# EAGLE board EDC-1 (EAGLE 9.6.2)
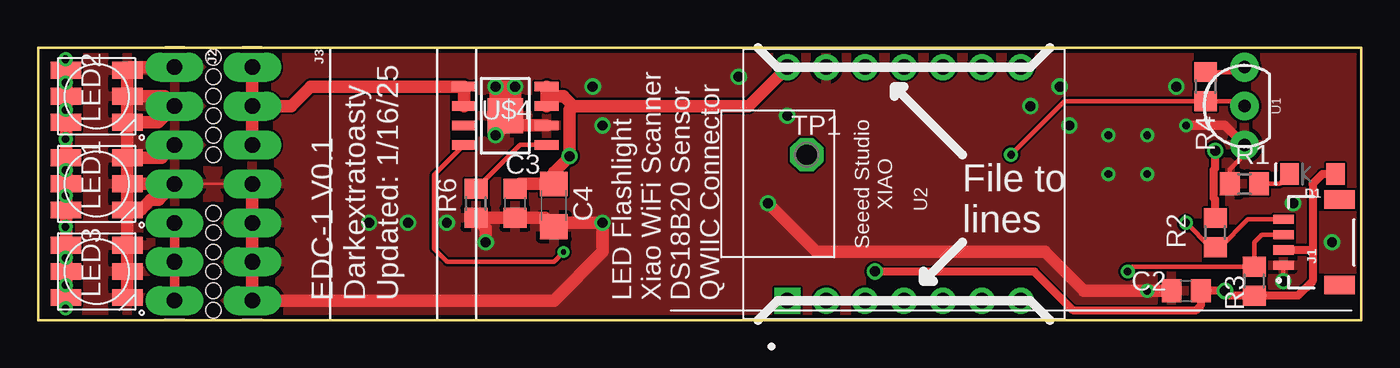
[diagram p0: board, top side]
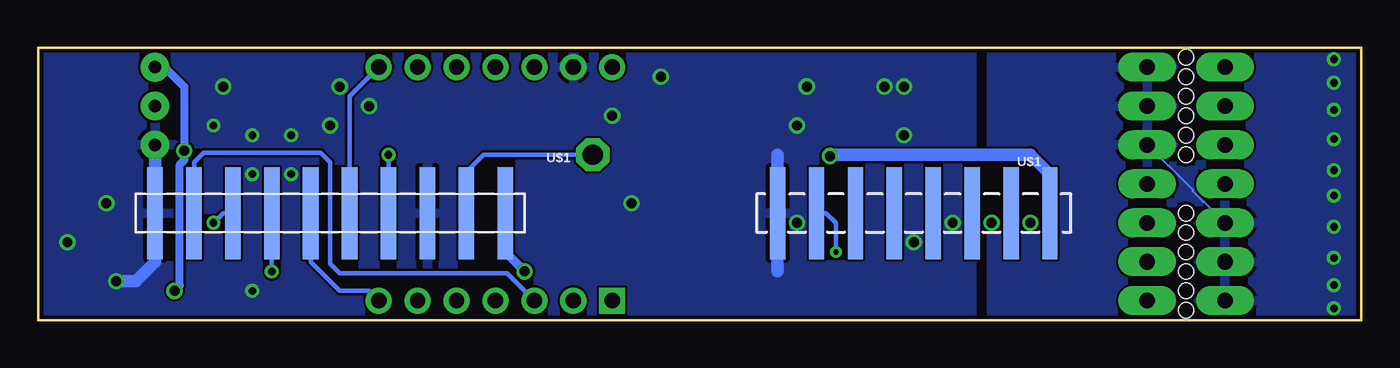
[diagram p1: board, bottom side, seen from below]

Size 86.36 x 17.78 mm. Coordinates in mm from the lower left corner, seen from the top.
Outline: 86.36,0 0,0 0,17.78 86.36,17.78 86.36,0
Copper layers (1*16): Top 0.035mm / dielectric 1.5mm / Bottom 0.035mm
Design rules "default *": minimum track width 6mil, minimum drill 0.35mm, track to track 6mil, track to pad 6mil, pad to pad 6mil, via to via 6mil, smd to smd 6mil, copper to edge 10mil, drill to drill 6mil, minimum pad ring 10mil, minimum via ring 8mil, stop-mask expansion 4mil, vias tented up to drill 0mil, thermal gap 10mil
Holes 1 mm at 11.43,14.61 11.43,13.34 11.43,17.14 11.43,15.88 11.43,1.91 11.43,0.64 11.43,3.17 11.43,4.45 11.43,5.71 11.43,6.99 11.43,12.06 11.43,10.79

## Footprints (pad centres in the part's own frame; a part is rotated, then mirrored left to right if it is on the bottom)
C0805 = smd 1.3 x 1.5: 1 -0.95,0; 2 0.95,0
C3216 = smd 1.6 x 1.8: 1 -1.4,0; 2 1.4,0
LED-1206 = smd 1.2 x 1.4: A -1.5,0; C 1.5,0
JST04_1MM_RA = smd 0.6 x 1.35: 1 -1.5,0; 2 -0.5,0; 3 0.5,0; 4 1.5,0 | smd 1.2 x 2: NC1 2.8,-3.675; NC2 -2.8,-3.675
1X07_LONGPADS = drill 1.016 pad 1.88 long: 1 0,0; 2 2.54,0; 3 5.08,0; 4 7.62,0; 5 10.16,0; 6 12.7,0; 7 15.24,0
RGBLED5050 = smd 2 x 1.1: 1 -2,1.7; 2 -2,0; 3 -2,-1.7; 4 2,-1.7; 5 2,0; 6 2,1.7
R0805 = smd 1.3 x 1.5: 1 -0.95,0; 2 0.95,0
P1-13 = drill 1.321 pad 2.159 octagon: TP 0,0
TO-92-AMMO = drill 0.813 pad 1.88: 1 -2.54,0; 2 0,0; 3 2.54,0
XIAO-GENERIC-THRUHOLE-MODULE14P-2.54-21X17.8MM = drill 1 pad 1.7 square: 1 -7.62,7.62 | drill 1 pad 1.7: 2 -7.62,5.08; 3 -7.62,2.54; 4 -7.62,0; 5 -7.62,-2.54; 6 -7.62,-5.08; 7 -7.62,-7.62; 8 7.62,-7.62; 9 7.62,-5.08; 10 7.62,-2.54; 11 7.62,0; 12 7.62,2.54; 13 7.62,5.08; 14 7.62,7.62
BOTH-SMD = smd 1.02 x 6 bottom: 1 7.62,0; 2 10.16,0; 3 12.7,0; 4 15.24,0; 5 17.78,0; 6 20.32,0; 7 22.86,0; 8 25.4,0; 9 27.94,0; 10 30.48,0 | smd 1 x 6 bottom: 19 -27.94,-0.001; 20 -22.86,-0.001; 21 -20.32,0.001; 22 -17.78,-0.001; 23 -15.24,0.001; 24 -12.7,-0.001; 25 -10.16,0.001; 26 -25.4,-0.001
SOIC127P600X175-9N = smd 1.55 x 0.6: 1 -2.7,1.905; 2 -2.7,0.635; 3 -2.7,-0.635; 4 -2.7,-1.905; 5 2.7,-1.905; 6 2.7,-0.635; 7 2.7,0.635; 8 2.7,1.905 | smd 2.3 x 2.3: 9 0,0

## Placement (x,y rotation side)
C2  1uf  [C0805]  74.93,1.91 180 top
C3  1uf  [C0805]  31.11,7.62 270 top
C4  22uf  [C3216]  33.66,7.49 270 top
D1  Yellow  [LED-1206]  83.19,9.53 180 top
J1  QWIIC_RIGHT_ANGLE  [JST04_1MM_RA]  81.28,5.08 90 top
J2  [1X07_LONGPADS]  8.89,16.51 270 top
J3  [1X07_LONGPADS]  13.97,16.51 270 top
LED1  RGBLED5050  [RGBLED5050]  3.81,8.89 0 top
LED2  RGBLED5050  [RGBLED5050]  3.81,14.61 0 top
LED3  RGBLED5050  [RGBLED5050]  3.81,3.17 0 top
R1  2K2  [R0805]  78.74,8.89 0 top
R2  10K  [R0805]  76.83,5.71 270 top
R3  10K  [R0805]  79.38,2.54 90 top
R4  10K  [R0805]  76.2,15.24 270 top
R6  10K  [R0805]  28.57,7.62 90 top
TP1  PTR1PAD1-13  [P1-13]  50.16,10.79 0 top
U1  DS18B20  [TO-92-AMMO]  78.74,13.97 90 top
U2  XIAO-THRUHOLE  [XIAO-GENERIC-THRUHOLE-MODULE14P-2.54-21X17.8MM]  56.52,8.89 90 top
U$1  BOTH-SMD  [BOTH-SMD]  48.26,6.99 0 top
U$4  CN5711  [SOIC127P600X175-9N]  30.48,13.34 180 top

## Library data of the parts
C2-C4 = rcl; SPICEPREFIX: C
D1 = SparkFun-LED; PROD_ID: DIO-09909
J1 = SparkFun-Connectors; PROD_ID: CONN-13694
J2 J3 = SparkFun-Connectors
LED1-LED3 = adafruit
R1-R4 R6 = rcl; SPICEPREFIX: R
TP1 = testpad
U1 = DS18B20; AVAILABILITY: In Stock; CHECK_PRICES: https://www.snapeda.com/parts/DS18B20/UMW/view-part/?ref=eda; DESCRIPTION: Temperature Sensor Digital, Local -55°C ~ 125°C 9 b, 10 b, 11 b, 12 b TO-92; MF: UMW; MP: DS18B20; PACKAGE: None; PRICE: None; SNAPEDA_LINK: https://www.snapeda.com/parts/DS18B20/UMW/view-part/?ref=snap
U2 = Seeed Studio XIAO Series
U$1 = Flipper-Zero-GPIO-Headers
U$4 = CN5711

## Nets
+3V3: C2.1 D1.A J1.2 R2.1 R3.1 R4.1 U1.3 U$1.1
+5V: C3.1 C4.1 U2.14 U$1.19 U$4.3 U$4.4
FLIP_RX: U2.7 U$1.6
FLIP_TX: U2.8 U$1.5
GND: C2.2 C3.2 C4.2 J1.1 J2.1 J2.2 J2.3 J2.4 J3.4 J3.5 J3.6 J3.7 LED1.4 LED1.5 LED1.6 LED2.4 LED2.5 LED2.6 LED3.4 LED3.5 LED3.6 R1.1 R6.1 U1.1 U2.13 U$1.3 U$1.10 U$1.25 U$4.2 U$4.9
LED+: J2.5 J2.6 J2.7 J3.1 J3.2 J3.3 LED1.1 LED1.2 LED1.3 LED2.1 LED2.2 LED2.3 LED3.1 LED3.2 LED3.3 U$4.5 U$4.6
LED_TRIG: U$1.24 U$4.8
N$1: TP1.TP U$1.2
N$5: R6.2 U$4.1
N$8: D1.C R1.2
SCL: J1.4 R2.2 U$1.8
SDA: J1.3 R3.2 U$1.7
THERM: R4.2 U1.2 U$1.4
WIFI_CHECK: U2.3 U$1.9

## Tracks (layer width: path | path; a pad name or v marks a point on that pad's centre or on a via)
+3V3  (via drill 0.65)
  Top 0.305: R4.1 78.42,16.19 U1.3
  Top 0.508: v54.61,3.17 54.62,3.16 65.03,3.16 67.57,0.62 75.56,0.62 75.88,0.94 C2.1 v77.47,1.91 77.78,1.59 R3.1 82.23,1.59 83.19,2.54 83.19,4.45 | D1.A 83.82,9.53 83.19,8.89 83.19,4.71 | 83.19,4.71 83.19,4.45 | J1.2 83.05,4.58 | 83.05,4.58 83.19,4.45 | 83.05,4.58 83.19,4.71 | R2.1 76.83,7.87 76.73,7.97 76.73,9.81 76.83,9.91 v76.83,11.05
  Bottom 0.508: v77.47,1.91 77.12,2.26 77.12,10.15 76.83,10.44 v76.83,11.05 76.83,15.24 78.11,16.51 U1.3
  Bottom 0.61: U$1.1 55.88,4.45 v54.61,3.17
+5V  (via drill 0.65)
  Top 0.813: U$4.4 33.18,14.61 | 33.18,14.61 U$4.3 | C3.1 31.44,8.89 C4.1 33.66,9.65 34.67,10.67 v34.67,10.7 34.67,13.72 34.92,13.97 | 34.92,13.97 34.29,14.61 33.18,14.61 | U2.14 46.35,13.97 34.92,13.97
  Bottom 0.305: U$1.19 20.32,9.53
  Bottom 0.813: 20.32,9.53 21.59,10.79 34.58,10.79 v34.67,10.7
FLIP_RX
  Bottom 0.305: U2.7 64.77,1.91 66.67,1.91 68.58,3.81 U$1.6
FLIP_TX
  Bottom 0.305: U2.8 66.04,14.61 U$1.5
GND  (via drill 0.5, 0.65)
  Top 0.152: J2.4 J3.4
  Top 0.305: R1.1 77.79,9.85 78.74,10.79 U1.1 | J1.1 v81.28,2.54
  Top 0.61: U1.1 77.47,12.7 v74.93,12.7
  Top 0.813: U$4.2 31.11,12.7 U$4.9 | v29.21,5.08 29.21,6.04 R6.1 C3.2 33.08,6.67 C4.2 33.91,6.35 v36.83,6.35 36.83,4.45 33.66,1.27 J3.7 J3.6 J3.5 J3.4 | U$4.9 30.48,12.7 v29.84,12.06 29.84,12.7 | U$4.9 29.84,13.97 v29.84,15.24 | U$4.9 31.11,13.97 v31.11,15.24 v29.84,15.24 | v29.84,15.24 30.48,14.61 | v47.62,7.62 50.8,4.45 65.72,4.45 68.27,1.91 C2.2 | LED3.4 LED3.5 LED3.6 LED1.4 | LED1.4 LED1.5 | LED1.5 LED1.6 | LED1.6 LED2.4 | LED2.4 LED2.5 | LED2.5 LED2.6 6.01,16.51 J2.1 | LED2.5 8.26,14.61 J2.2 7.83,12.9 LED2.4 | LED1.6 8.05,10.59 J2.3 | LED1.5 J2.4 7.85,7.85 7.33,7.85 6.67,7.19 LED1.4
  Bottom 0.813: 38.1,3.17 U$1.25 38.1,10.79 | U1.1 U$1.10 78.74,3.81 80.01,2.54 v81.28,2.54
  other vias: 24.13,6.35 21.59,6.35 26.67,6.35 36.2,15.24 45.72,15.88 36.83,12.7 48.9,13.34 64.77,13.97 74.3,15.24 67.31,12.7 81.92,7.62 84.45,5.08 66.67,15.24 69.85,9.53 72.39,9.53 72.39,12.06 69.85,12.06 72.39,1.91
  pour Top: 0,17.78 86.36,17.78 86.36,0 0,0
  pour Bottom: 25.4,17.78 86.36,17.78 86.36,0 25.4,0
LED+  (via drill 0.5)
  Top 0.61: J2.5 J2.6 J2.7
  Top 0.813: v1.78,17.02 1.78,16.34 LED2.1 LED2.2 LED2.3 LED1.1 LED1.2 LED1.3 LED3.1 LED3.2 LED3.3 1.81,0.79 v1.78,0.76 | U$4.6 U$4.5 17.78,15.24 16.51,13.97 J3.2 | J3.2 J3.1 | J3.2 J3.3
  Bottom 0.152: J3.3 12.6,10.06 12.55,10.06 11,8.51 11,8.41 10.31,7.72 10.26,7.72 J2.5
  other vias: 1.78,15.49 1.78,13.72 1.78,11.81 1.78,9.78 1.78,8.13 1.78,6.1 1.78,4.06 1.78,2.29
  pour Bottom: 0,17.78 24.13,17.78 24.13,0 0,0
LED_TRIG  (via drill 0.35)
  Top 0.305: v34.29,4.45 33.66,3.81 26.67,3.81 25.84,4.64 25.84,9.49 U$4.8
  Bottom 0.305: U$1.24 34.92,6.98 34.29,6.35 v34.29,4.45
N$1
  Bottom 0.305: U$1.2 58.42,9.66 57.28,10.79 TP1.TP
N$5
  Top 0.305: R6.2 31.43,11.43 U$4.1
N$8
  Top 0.305: D1.C 81.05,8.89 R1.2
SCL  (via drill 0.5)
  Top 0.305: J1.4 78.97,6.58 77.16,4.76 R2.2 76.52,4.76 v74.93,6.35
  Bottom 0.305: U$1.8 74.3,6.99 v74.93,6.35
SDA  (via drill 0.5)
  Top 0.305: J1.3 79.88,5.58 79.38,5.08 R3.2 71.44,3.49 v71.12,3.17
  Bottom 0.305: U$1.7 v71.12,3.17
THERM  (via drill 0.5)
  Top 0.305: U1.2 78.42,14.29 R4.2 67,14.29 v63.5,10.79
  Bottom 0.305: U$1.4 v63.5,10.79
WIFI_CHECK
  Bottom 0.305: U2.3 55.75,3.04 66.68,3.04 67.31,3.68 67.31,10.29 67.94,10.93 75.57,10.93 76.2,10.29 U$1.9

## Text on the board
tPlace: EDC-1 V0.1 / Darkextratoasty / Updated: 1/16/25 | LED Flashlight / Xiao WiFi Scanner / DS18B20 Sensor / QWIIC Connector
tNames: File to / lines